# EAGLE board Shifting_microSD_Panel_v10 (EAGLE 7.5.0), part 1 of 5
VERSION: v10
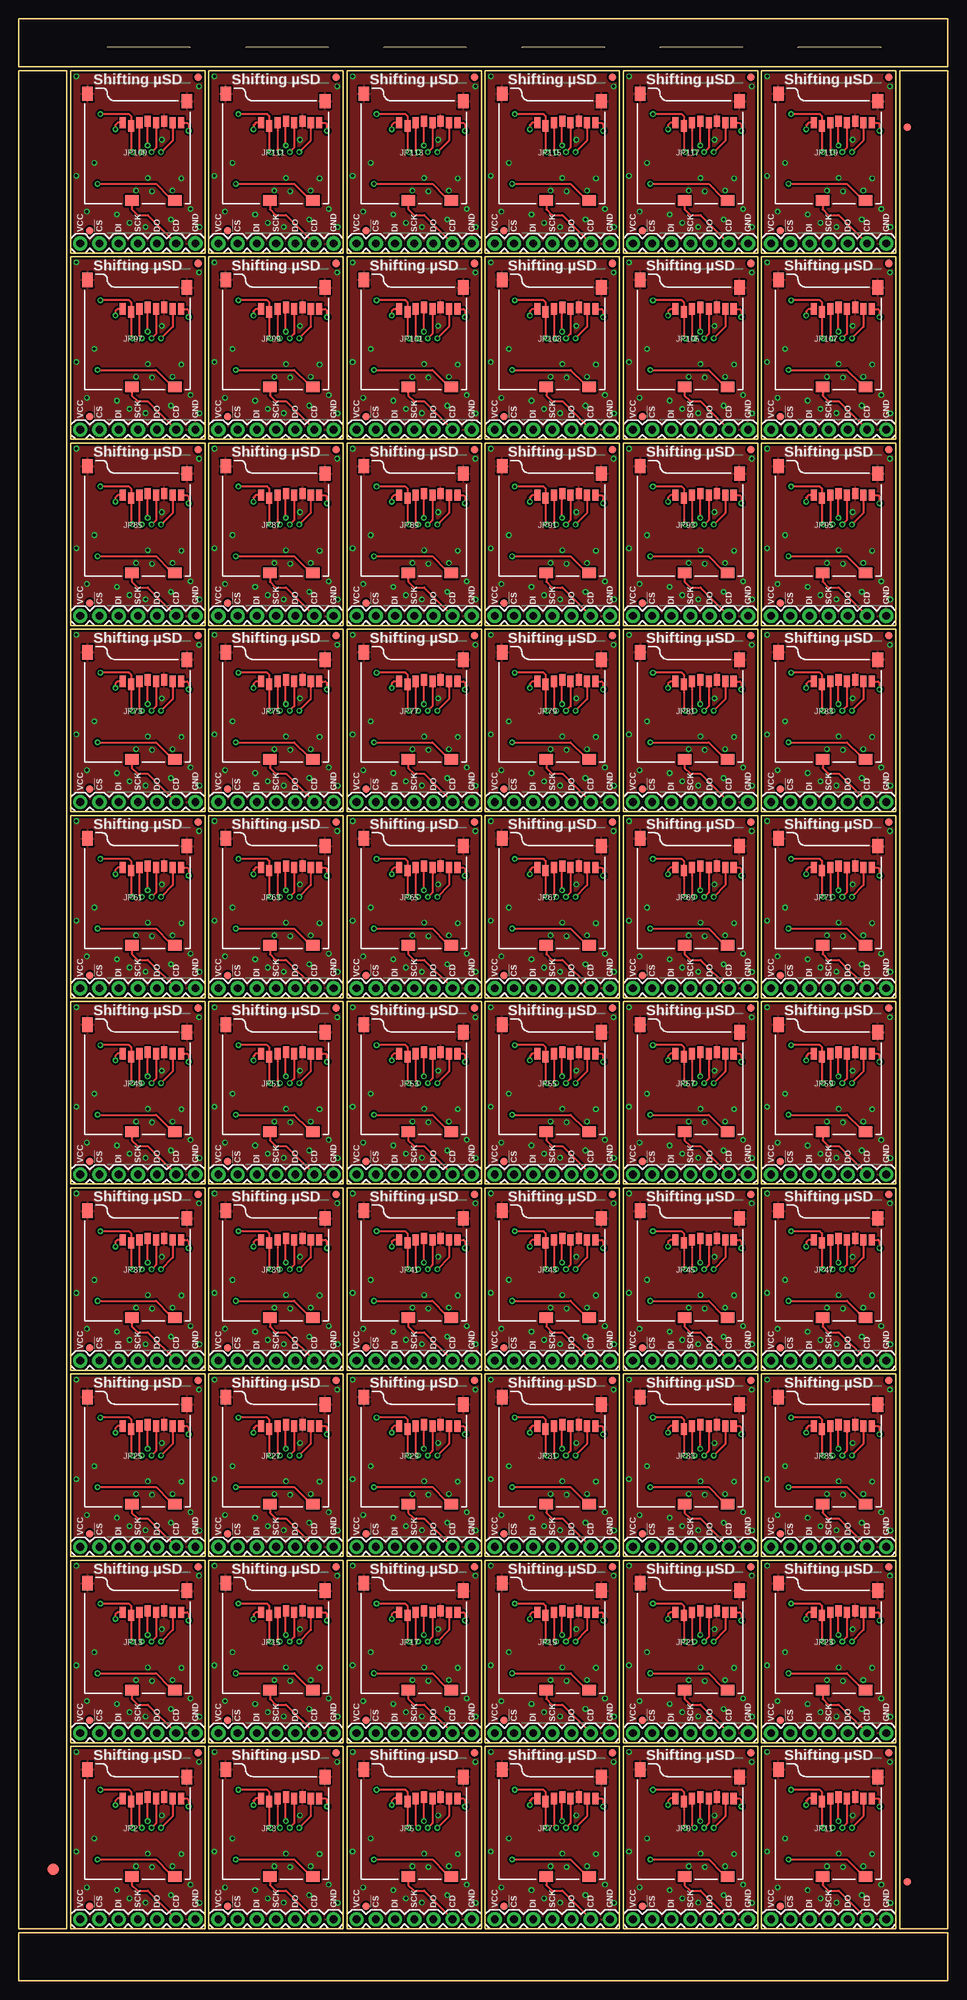
[diagram p0: board, top side]
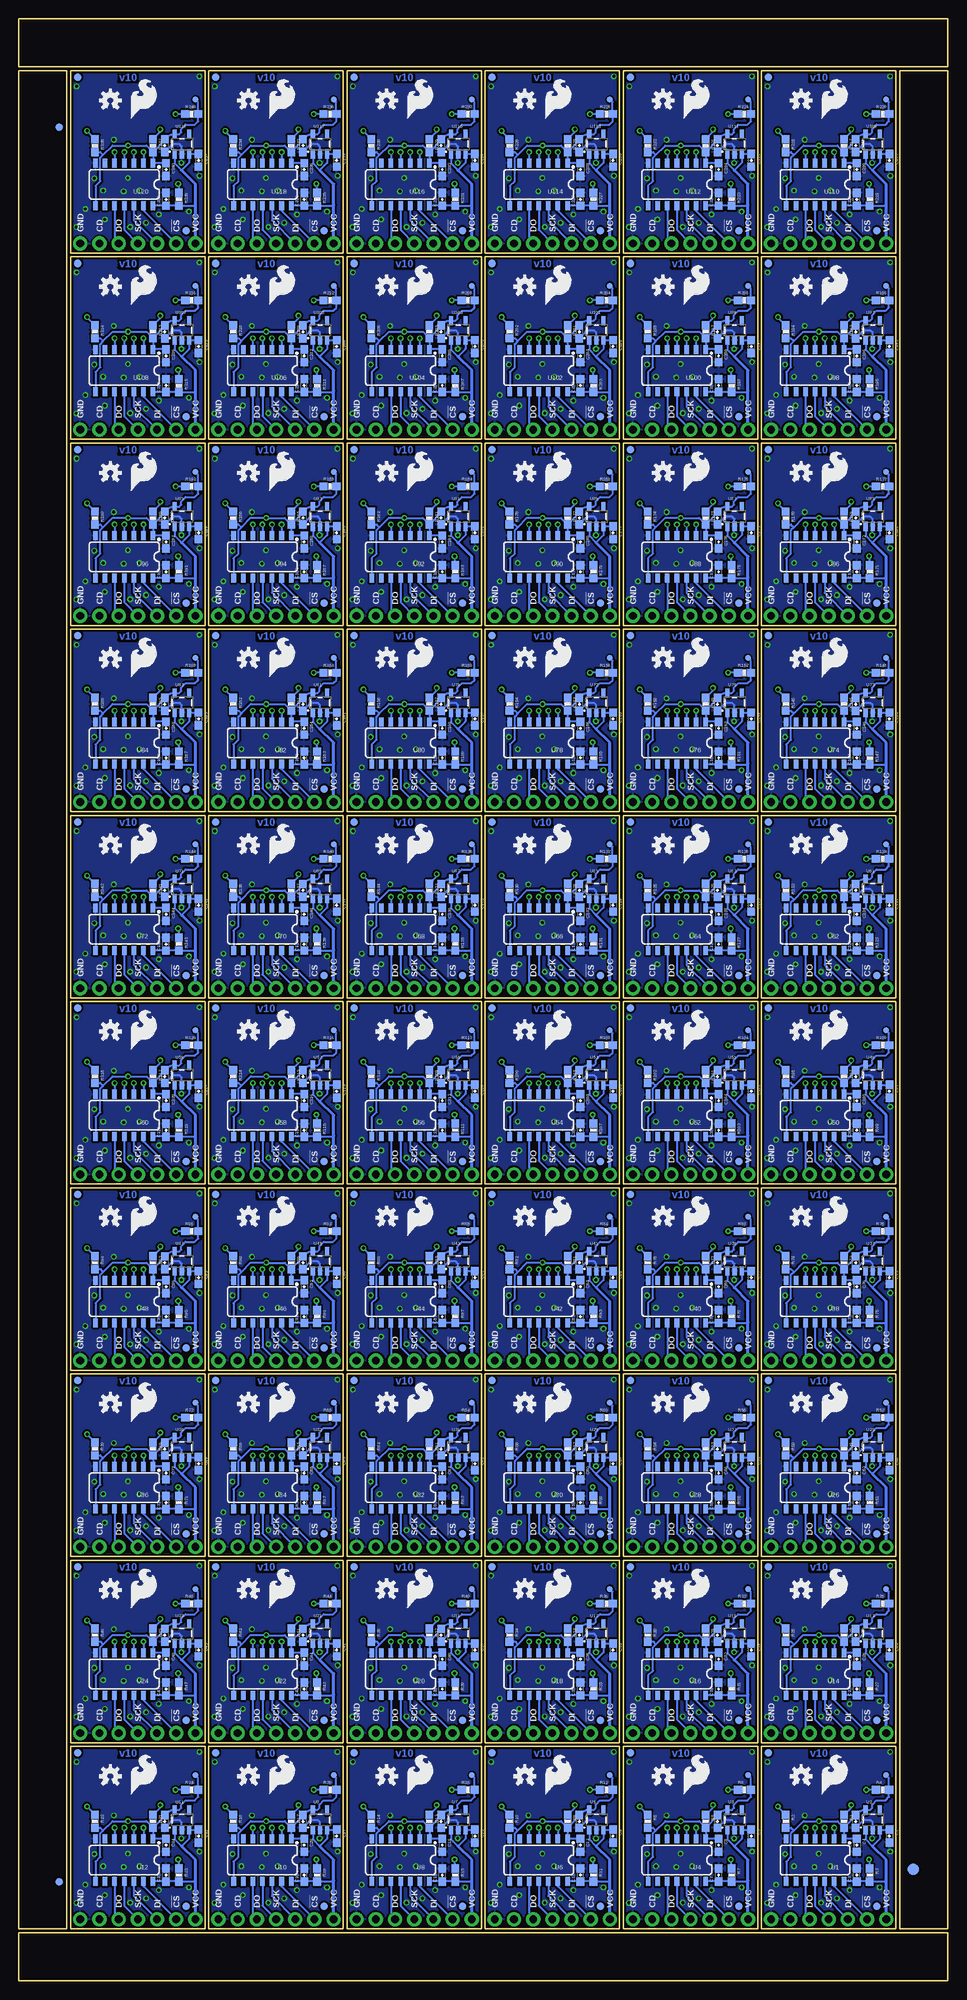
[diagram p1: board, bottom side, seen from below]

Size 122.94 x 259.59 mm. Coordinates in mm from the lower left corner, seen from the top.
Outline: 264 segments
Copper layers (1*16): Top 0.035mm / dielectric 1.5mm / Bottom 0.035mm
Design rules "SparkFun-2-layer-TIGHT": minimum track width 7mil, minimum drill 15mil, track to track 7mil, track to pad 7mil, pad to pad 7mil, via to via 7mil, smd to smd 7mil, copper to edge 7mil, drill to drill 7mil, minimum pad ring 7mil, minimum via ring 7mil, stop-mask expansion 4mil, vias tented up to drill 20mil, thermal gap 10mil

## Footprints (pad centres in the part's own frame; a part is rotated, then mirrored left to right if it is on the bottom)
0603-CAP = smd 1.1 x 1: 1 -0.85,0; 2 0.85,0
FIDUCIAL-1X2 = smd 1 x 1: 1 0,0
FIDUCIAL-1.5X3 = smd 1.5 x 1.5: 1 0,0
1X07 = drill 1.016 pad 1.88: 1 0,0; 2 2.54,0; 3 5.08,0; 4 7.62,0; 5 10.16,0; 6 12.7,0; 7 15.24,0
MICRO-SD-SOCKET-PP = smd 1.8 x 1.4: CD1 -2.05,0.4; CD2 -7.75,0.4 | smd 0.8 x 1.5: CS -7.84,10.3; DI -6.74,10.7; DO -2.34,10.7; GND -3.44,10.9; RSV1 -8.94,10.7; RSV2 -1.24,10.7; SCLK -4.54,10.7; VCC -5.64,10.9 | smd 1.4 x 1.9: GND1 -13.6,14.55; GND3 -0.45,13.55
0603-RES = smd 1.1 x 1: 1 -0.85,0; 2 0.85,0
PAD.03X.03 = smd 0.762 x 0.762: P$1 0,0
SO14 = smd 0.6 x 1.2: 1 -3.81,-2.8; 2 -2.54,-2.8; 3 -1.27,-2.8; 4 0,-2.8; 5 1.27,-2.8; 6 2.54,-2.8; 7 3.81,-2.8; 8 3.81,2.8; 9 2.54,2.8; 10 1.27,2.8; 11 0,2.8; 12 -1.27,2.8; 13 -2.54,2.8; 14 -3.81,2.8
SOT23-5 = smd 0.55 x 1.2: 1 -0.95,-1.3; 2 0,-1.3; 3 0.95,-1.3; 4 0.95,1.3; 5 -0.95,1.3

## Placement (x,y rotation side)
C1  1.0uF  [0603-CAP]  7.71,19.13 270 bottom
C2  1.0uF  [0603-CAP]  12.18,21.07 270 bottom
C3  0.1uF  [0603-CAP]  12.03,13.97 90 bottom
C4  0.1uF  [0603-CAP]  12.03,17.91 270 bottom
C5  1.0uF  [0603-CAP]  26,19.13 270 bottom
C6  1.0uF  [0603-CAP]  30.47,21.07 270 bottom
C7  0.1uF  [0603-CAP]  30.31,13.97 90 bottom
C8  0.1uF  [0603-CAP]  30.31,17.91 270 bottom
C9  1.0uF  [0603-CAP]  44.28,19.13 270 bottom
C10  1.0uF  [0603-CAP]  48.76,21.07 270 bottom
C11  0.1uF  [0603-CAP]  48.6,13.97 90 bottom
C12  0.1uF  [0603-CAP]  48.6,17.91 270 bottom
C13  1.0uF  [0603-CAP]  62.57,19.13 270 bottom
C14  1.0uF  [0603-CAP]  67.04,21.07 270 bottom
C15  0.1uF  [0603-CAP]  66.89,13.97 90 bottom
C16  0.1uF  [0603-CAP]  66.89,17.91 270 bottom
C17  1.0uF  [0603-CAP]  80.86,19.13 270 bottom
C18  1.0uF  [0603-CAP]  85.33,21.07 270 bottom
C19  0.1uF  [0603-CAP]  85.18,13.97 90 bottom
C20  0.1uF  [0603-CAP]  85.18,17.91 270 bottom
C21  1.0uF  [0603-CAP]  99.15,19.13 270 bottom
C22  1.0uF  [0603-CAP]  103.62,21.07 270 bottom
C23  0.1uF  [0603-CAP]  103.47,13.97 90 bottom
C24  0.1uF  [0603-CAP]  103.47,17.91 270 bottom
C25  1.0uF  [0603-CAP]  7.71,43.76 270 bottom
C26  1.0uF  [0603-CAP]  12.18,45.71 270 bottom
C27  0.1uF  [0603-CAP]  12.03,38.61 90 bottom
C28  0.1uF  [0603-CAP]  12.03,42.55 270 bottom
C29  1.0uF  [0603-CAP]  26,43.76 270 bottom
C30  1.0uF  [0603-CAP]  30.47,45.71 270 bottom
C31  0.1uF  [0603-CAP]  30.31,38.61 90 bottom
C32  0.1uF  [0603-CAP]  30.31,42.55 270 bottom
C33  1.0uF  [0603-CAP]  44.28,43.76 270 bottom
C34  1.0uF  [0603-CAP]  48.76,45.71 270 bottom
C35  0.1uF  [0603-CAP]  48.6,38.61 90 bottom
C36  0.1uF  [0603-CAP]  48.6,42.55 270 bottom
C37  1.0uF  [0603-CAP]  62.57,43.76 270 bottom
C38  1.0uF  [0603-CAP]  67.04,45.71 270 bottom
C39  0.1uF  [0603-CAP]  66.89,38.61 90 bottom
C40  0.1uF  [0603-CAP]  66.89,42.55 270 bottom
C41  1.0uF  [0603-CAP]  80.86,43.76 270 bottom
C42  1.0uF  [0603-CAP]  85.33,45.71 270 bottom
C43  0.1uF  [0603-CAP]  85.18,38.61 90 bottom
C44  0.1uF  [0603-CAP]  85.18,42.55 270 bottom
C45  1.0uF  [0603-CAP]  99.15,43.76 270 bottom
C46  1.0uF  [0603-CAP]  103.62,45.71 270 bottom
C47  0.1uF  [0603-CAP]  103.47,38.61 90 bottom
C48  0.1uF  [0603-CAP]  103.47,42.55 270 bottom
C49  1.0uF  [0603-CAP]  7.71,68.4 270 bottom
C50  1.0uF  [0603-CAP]  12.18,70.35 270 bottom
C51  0.1uF  [0603-CAP]  12.03,63.25 90 bottom
C52  0.1uF  [0603-CAP]  12.03,67.18 270 bottom
C53  1.0uF  [0603-CAP]  26,68.4 270 bottom
C54  1.0uF  [0603-CAP]  30.47,70.35 270 bottom
C55  0.1uF  [0603-CAP]  30.31,63.25 90 bottom
C56  0.1uF  [0603-CAP]  30.31,67.18 270 bottom
C57  1.0uF  [0603-CAP]  44.28,68.4 270 bottom
C58  1.0uF  [0603-CAP]  48.76,70.35 270 bottom
C59  0.1uF  [0603-CAP]  48.6,63.25 90 bottom
C60  0.1uF  [0603-CAP]  48.6,67.18 270 bottom
C61  1.0uF  [0603-CAP]  62.57,68.4 270 bottom
C62  1.0uF  [0603-CAP]  67.04,70.35 270 bottom
C63  0.1uF  [0603-CAP]  66.89,63.25 90 bottom
C64  0.1uF  [0603-CAP]  66.89,67.18 270 bottom
C65  1.0uF  [0603-CAP]  80.86,68.4 270 bottom
C66  1.0uF  [0603-CAP]  85.33,70.35 270 bottom
C67  0.1uF  [0603-CAP]  85.18,63.25 90 bottom
C68  0.1uF  [0603-CAP]  85.18,67.18 270 bottom
C69  1.0uF  [0603-CAP]  99.15,68.4 270 bottom
C70  1.0uF  [0603-CAP]  103.62,70.35 270 bottom
C71  0.1uF  [0603-CAP]  103.47,63.25 90 bottom
C72  0.1uF  [0603-CAP]  103.47,67.18 270 bottom
C73  1.0uF  [0603-CAP]  7.71,93.04 270 bottom
C74  1.0uF  [0603-CAP]  12.18,94.98 270 bottom
C75  0.1uF  [0603-CAP]  12.03,87.88 90 bottom
C76  0.1uF  [0603-CAP]  12.03,91.82 270 bottom
C77  1.0uF  [0603-CAP]  26,93.04 270 bottom
C78  1.0uF  [0603-CAP]  30.47,94.98 270 bottom
C79  0.1uF  [0603-CAP]  30.31,87.88 90 bottom
C80  0.1uF  [0603-CAP]  30.31,91.82 270 bottom
C81  1.0uF  [0603-CAP]  44.28,93.04 270 bottom
C82  1.0uF  [0603-CAP]  48.76,94.98 270 bottom
C83  0.1uF  [0603-CAP]  48.6,87.88 90 bottom
C84  0.1uF  [0603-CAP]  48.6,91.82 270 bottom
C85  1.0uF  [0603-CAP]  62.57,93.04 270 bottom
C86  1.0uF  [0603-CAP]  67.04,94.98 270 bottom
C87  0.1uF  [0603-CAP]  66.89,87.88 90 bottom
C88  0.1uF  [0603-CAP]  66.89,91.82 270 bottom
C89  1.0uF  [0603-CAP]  80.86,93.04 270 bottom
C90  1.0uF  [0603-CAP]  85.33,94.98 270 bottom
C91  0.1uF  [0603-CAP]  85.18,87.88 90 bottom
C92  0.1uF  [0603-CAP]  85.18,91.82 270 bottom
C93  1.0uF  [0603-CAP]  99.15,93.04 270 bottom
C94  1.0uF  [0603-CAP]  103.62,94.98 270 bottom
C95  0.1uF  [0603-CAP]  103.47,87.88 90 bottom
C96  0.1uF  [0603-CAP]  103.47,91.82 270 bottom
C97  1.0uF  [0603-CAP]  7.71,117.68 270 bottom
C98  1.0uF  [0603-CAP]  12.18,119.62 270 bottom
C99  0.1uF  [0603-CAP]  12.03,112.52 90 bottom
C100  0.1uF  [0603-CAP]  12.03,116.46 270 bottom
C101  1.0uF  [0603-CAP]  26,117.68 270 bottom
C102  1.0uF  [0603-CAP]  30.47,119.62 270 bottom
C103  0.1uF  [0603-CAP]  30.31,112.52 90 bottom
C104  0.1uF  [0603-CAP]  30.31,116.46 270 bottom
C105  1.0uF  [0603-CAP]  44.28,117.68 270 bottom
C106  1.0uF  [0603-CAP]  48.76,119.62 270 bottom
C107  0.1uF  [0603-CAP]  48.6,112.52 90 bottom
C108  0.1uF  [0603-CAP]  48.6,116.46 270 bottom
C109  1.0uF  [0603-CAP]  62.57,117.68 270 bottom
C110  1.0uF  [0603-CAP]  67.04,119.62 270 bottom
C111  0.1uF  [0603-CAP]  66.89,112.52 90 bottom
C112  0.1uF  [0603-CAP]  66.89,116.46 270 bottom
C113  1.0uF  [0603-CAP]  80.86,117.68 270 bottom
C114  1.0uF  [0603-CAP]  85.33,119.62 270 bottom
C115  0.1uF  [0603-CAP]  85.18,112.52 90 bottom
C116  0.1uF  [0603-CAP]  85.18,116.46 270 bottom
C117  1.0uF  [0603-CAP]  99.15,117.68 270 bottom
C118  1.0uF  [0603-CAP]  103.62,119.62 270 bottom
C119  0.1uF  [0603-CAP]  103.47,112.52 90 bottom
C120  0.1uF  [0603-CAP]  103.47,116.46 270 bottom
C121  1.0uF  [0603-CAP]  7.71,142.32 270 bottom
C122  1.0uF  [0603-CAP]  12.18,144.26 270 bottom
C123  0.1uF  [0603-CAP]  12.03,137.16 90 bottom
C124  0.1uF  [0603-CAP]  12.03,141.1 270 bottom
C125  1.0uF  [0603-CAP]  26,142.32 270 bottom
C126  1.0uF  [0603-CAP]  30.47,144.26 270 bottom
C127  0.1uF  [0603-CAP]  30.31,137.16 90 bottom
C128  0.1uF  [0603-CAP]  30.31,141.1 270 bottom
C129  1.0uF  [0603-CAP]  44.28,142.32 270 bottom
C130  1.0uF  [0603-CAP]  48.76,144.26 270 bottom
C131  0.1uF  [0603-CAP]  48.6,137.16 90 bottom
C132  0.1uF  [0603-CAP]  48.6,141.1 270 bottom
C133  1.0uF  [0603-CAP]  62.57,142.32 270 bottom
C134  1.0uF  [0603-CAP]  67.04,144.26 270 bottom
C135  0.1uF  [0603-CAP]  66.89,137.16 90 bottom
C136  0.1uF  [0603-CAP]  66.89,141.1 270 bottom
C137  1.0uF  [0603-CAP]  80.86,142.32 270 bottom
C138  1.0uF  [0603-CAP]  85.33,144.26 270 bottom
C139  0.1uF  [0603-CAP]  85.18,137.16 90 bottom
C140  0.1uF  [0603-CAP]  85.18,141.1 270 bottom
C141  1.0uF  [0603-CAP]  99.15,142.32 270 bottom
C142  1.0uF  [0603-CAP]  103.62,144.26 270 bottom
C143  0.1uF  [0603-CAP]  103.47,137.16 90 bottom
C144  0.1uF  [0603-CAP]  103.47,141.1 270 bottom
C145  1.0uF  [0603-CAP]  7.71,166.95 270 bottom
C146  1.0uF  [0603-CAP]  12.18,168.9 270 bottom
C147  0.1uF  [0603-CAP]  12.03,161.8 90 bottom
C148  0.1uF  [0603-CAP]  12.03,165.74 270 bottom
C149  1.0uF  [0603-CAP]  26,166.95 270 bottom
C150  1.0uF  [0603-CAP]  30.47,168.9 270 bottom
C151  0.1uF  [0603-CAP]  30.31,161.8 90 bottom
C152  0.1uF  [0603-CAP]  30.31,165.74 270 bottom
C153  1.0uF  [0603-CAP]  44.28,166.95 270 bottom
C154  1.0uF  [0603-CAP]  48.76,168.9 270 bottom
C155  0.1uF  [0603-CAP]  48.6,161.8 90 bottom
C156  0.1uF  [0603-CAP]  48.6,165.74 270 bottom
C157  1.0uF  [0603-CAP]  62.57,166.95 270 bottom
C158  1.0uF  [0603-CAP]  67.04,168.9 270 bottom
C159  0.1uF  [0603-CAP]  66.89,161.8 90 bottom
C160  0.1uF  [0603-CAP]  66.89,165.74 270 bottom
C161  1.0uF  [0603-CAP]  80.86,166.95 270 bottom
C162  1.0uF  [0603-CAP]  85.33,168.9 270 bottom
C163  0.1uF  [0603-CAP]  85.18,161.8 90 bottom
C164  0.1uF  [0603-CAP]  85.18,165.74 270 bottom
C165  1.0uF  [0603-CAP]  99.15,166.95 270 bottom
C166  1.0uF  [0603-CAP]  103.62,168.9 270 bottom
C167  0.1uF  [0603-CAP]  103.47,161.8 90 bottom
C168  0.1uF  [0603-CAP]  103.47,165.74 270 bottom
C169  1.0uF  [0603-CAP]  7.71,191.59 270 bottom
C170  1.0uF  [0603-CAP]  12.18,193.54 270 bottom
C171  0.1uF  [0603-CAP]  12.03,186.44 90 bottom
C172  0.1uF  [0603-CAP]  12.03,190.37 270 bottom
C173  1.0uF  [0603-CAP]  26,191.59 270 bottom
C174  1.0uF  [0603-CAP]  30.47,193.54 270 bottom
C175  0.1uF  [0603-CAP]  30.31,186.44 90 bottom
C176  0.1uF  [0603-CAP]  30.31,190.37 270 bottom
C177  1.0uF  [0603-CAP]  44.28,191.59 270 bottom
C178  1.0uF  [0603-CAP]  48.76,193.54 270 bottom
C179  0.1uF  [0603-CAP]  48.6,186.44 90 bottom
C180  0.1uF  [0603-CAP]  48.6,190.37 270 bottom
C181  1.0uF  [0603-CAP]  62.57,191.59 270 bottom
C182  1.0uF  [0603-CAP]  67.04,193.54 270 bottom
C183  0.1uF  [0603-CAP]  66.89,186.44 90 bottom
C184  0.1uF  [0603-CAP]  66.89,190.37 270 bottom
C185  1.0uF  [0603-CAP]  80.86,191.59 270 bottom
C186  1.0uF  [0603-CAP]  85.33,193.54 270 bottom
C187  0.1uF  [0603-CAP]  85.18,186.44 90 bottom
C188  0.1uF  [0603-CAP]  85.18,190.37 270 bottom
C189  1.0uF  [0603-CAP]  99.15,191.59 270 bottom
C190  1.0uF  [0603-CAP]  103.62,193.54 270 bottom
C191  0.1uF  [0603-CAP]  103.47,186.44 90 bottom
C192  0.1uF  [0603-CAP]  103.47,190.37 270 bottom
C193  1.0uF  [0603-CAP]  7.71,216.23 270 bottom
C194  1.0uF  [0603-CAP]  12.18,218.17 270 bottom
C195  0.1uF  [0603-CAP]  12.03,211.07 90 bottom
C196  0.1uF  [0603-CAP]  12.03,215.01 270 bottom
C197  1.0uF  [0603-CAP]  26,216.23 270 bottom
C198  1.0uF  [0603-CAP]  30.47,218.17 270 bottom
C199  0.1uF  [0603-CAP]  30.31,211.07 90 bottom
C200  0.1uF  [0603-CAP]  30.31,215.01 270 bottom
C201  1.0uF  [0603-CAP]  44.28,216.23 270 bottom
C202  1.0uF  [0603-CAP]  48.76,218.17 270 bottom
C203  0.1uF  [0603-CAP]  48.6,211.07 90 bottom
C204  0.1uF  [0603-CAP]  48.6,215.01 270 bottom
C205  1.0uF  [0603-CAP]  62.57,216.23 270 bottom
C206  1.0uF  [0603-CAP]  67.04,218.17 270 bottom
C207  0.1uF  [0603-CAP]  66.89,211.07 90 bottom
C208  0.1uF  [0603-CAP]  66.89,215.01 270 bottom
C209  1.0uF  [0603-CAP]  80.86,216.23 270 bottom
C210  1.0uF  [0603-CAP]  85.33,218.17 270 bottom
C211  0.1uF  [0603-CAP]  85.18,211.07 90 bottom
C212  0.1uF  [0603-CAP]  85.18,215.01 270 bottom
C213  1.0uF  [0603-CAP]  99.15,216.23 270 bottom
C214  1.0uF  [0603-CAP]  103.62,218.17 270 bottom
C215  0.1uF  [0603-CAP]  103.47,211.07 90 bottom
C216  0.1uF  [0603-CAP]  103.47,215.01 270 bottom
C217  1.0uF  [0603-CAP]  7.71,240.87 270 bottom
C218  1.0uF  [0603-CAP]  12.18,242.81 270 bottom
C219  0.1uF  [0603-CAP]  12.03,235.71 90 bottom
C220  0.1uF  [0603-CAP]  12.03,239.65 270 bottom
C221  1.0uF  [0603-CAP]  26,240.87 270 bottom
C222  1.0uF  [0603-CAP]  30.47,242.81 270 bottom
C223  0.1uF  [0603-CAP]  30.31,235.71 90 bottom
C224  0.1uF  [0603-CAP]  30.31,239.65 270 bottom
C225  1.0uF  [0603-CAP]  44.28,240.87 270 bottom
C226  1.0uF  [0603-CAP]  48.76,242.81 270 bottom
C227  0.1uF  [0603-CAP]  48.6,235.71 90 bottom
C228  0.1uF  [0603-CAP]  48.6,239.65 270 bottom
C229  1.0uF  [0603-CAP]  62.57,240.87 270 bottom
C230  1.0uF  [0603-CAP]  67.04,242.81 270 bottom
C231  0.1uF  [0603-CAP]  66.89,235.71 90 bottom
C232  0.1uF  [0603-CAP]  66.89,239.65 270 bottom
C233  1.0uF  [0603-CAP]  80.86,240.87 270 bottom
C234  1.0uF  [0603-CAP]  85.33,242.81 270 bottom
C235  0.1uF  [0603-CAP]  85.18,235.71 90 bottom
C236  0.1uF  [0603-CAP]  85.18,239.65 270 bottom
C237  1.0uF  [0603-CAP]  99.15,240.87 270 bottom
C238  1.0uF  [0603-CAP]  103.62,242.81 270 bottom
C239  0.1uF  [0603-CAP]  103.47,235.71 90 bottom
C240  0.1uF  [0603-CAP]  103.47,239.65 270 bottom
E$1  [FIDUCIAL-1X2]  117.6,13.08 90 top
E$2  [FIDUCIAL-1.5X3]  4.57,14.73 0 top
E$3  [FIDUCIAL-1.5X3]  4.57,14.73 0 bottom
E$4  [FIDUCIAL-1X2]  117.6,245.24 90 top
E$5  [FIDUCIAL-1X2]  117.6,13.08 90 bottom
E$6  [FIDUCIAL-1X2]  117.6,245.24 90 bottom
FID1  FIDUCIAL1X2  [FIDUCIAL-1X2]  23.72,30.12 0 bottom
FID2  FIDUCIAL1X2  [FIDUCIAL-1X2]  9.37,9.83 0 bottom
FID3  FIDUCIAL1X2  [FIDUCIAL-1X2]  23.72,30.12 0 top
FID4  FIDUCIAL1X2  [FIDUCIAL-1X2]  9.37,9.83 0 top
FID5  FIDUCIAL1X2  [FIDUCIAL-1X2]  42.01,30.12 0 bottom
FID6  FIDUCIAL1X2  [FIDUCIAL-1X2]  27.66,9.83 0 bottom
FID7  FIDUCIAL1X2  [FIDUCIAL-1X2]  42.01,30.12 0 top
FID8  FIDUCIAL1X2  [FIDUCIAL-1X2]  27.66,9.83 0 top
FID9  FIDUCIAL1X2  [FIDUCIAL-1X2]  60.3,30.12 0 bottom
FID10  FIDUCIAL1X2  [FIDUCIAL-1X2]  45.95,9.83 0 bottom
FID11  FIDUCIAL1X2  [FIDUCIAL-1X2]  60.3,30.12 0 top
FID12  FIDUCIAL1X2  [FIDUCIAL-1X2]  45.95,9.83 0 top
FID13  FIDUCIAL1X2  [FIDUCIAL-1X2]  78.59,30.12 0 bottom
FID14  FIDUCIAL1X2  [FIDUCIAL-1X2]  64.24,9.83 0 bottom
FID15  FIDUCIAL1X2  [FIDUCIAL-1X2]  78.59,30.12 0 top
FID16  FIDUCIAL1X2  [FIDUCIAL-1X2]  64.24,9.83 0 top
FID17  FIDUCIAL1X2  [FIDUCIAL-1X2]  96.88,30.12 0 bottom
FID18  FIDUCIAL1X2  [FIDUCIAL-1X2]  82.52,9.83 0 bottom
FID19  FIDUCIAL1X2  [FIDUCIAL-1X2]  96.88,30.12 0 top
FID20  FIDUCIAL1X2  [FIDUCIAL-1X2]  82.52,9.83 0 top
FID21  FIDUCIAL1X2  [FIDUCIAL-1X2]  115.16,30.12 0 bottom
FID22  FIDUCIAL1X2  [FIDUCIAL-1X2]  100.81,9.83 0 bottom
FID23  FIDUCIAL1X2  [FIDUCIAL-1X2]  115.16,30.12 0 top
FID24  FIDUCIAL1X2  [FIDUCIAL-1X2]  100.81,9.83 0 top
FID25  FIDUCIAL1X2  [FIDUCIAL-1X2]  23.72,54.76 0 bottom
FID26  FIDUCIAL1X2  [FIDUCIAL-1X2]  9.37,34.47 0 bottom
FID27  FIDUCIAL1X2  [FIDUCIAL-1X2]  23.72,54.76 0 top
FID28  FIDUCIAL1X2  [FIDUCIAL-1X2]  9.37,34.47 0 top
FID29  FIDUCIAL1X2  [FIDUCIAL-1X2]  42.01,54.76 0 bottom
FID30  FIDUCIAL1X2  [FIDUCIAL-1X2]  27.66,34.47 0 bottom
FID31  FIDUCIAL1X2  [FIDUCIAL-1X2]  42.01,54.76 0 top
FID32  FIDUCIAL1X2  [FIDUCIAL-1X2]  27.66,34.47 0 top
FID33  FIDUCIAL1X2  [FIDUCIAL-1X2]  60.3,54.76 0 bottom
FID34  FIDUCIAL1X2  [FIDUCIAL-1X2]  45.95,34.47 0 bottom
FID35  FIDUCIAL1X2  [FIDUCIAL-1X2]  60.3,54.76 0 top
FID36  FIDUCIAL1X2  [FIDUCIAL-1X2]  45.95,34.47 0 top
FID37  FIDUCIAL1X2  [FIDUCIAL-1X2]  78.59,54.76 0 bottom
FID38  FIDUCIAL1X2  [FIDUCIAL-1X2]  64.24,34.47 0 bottom
FID39  FIDUCIAL1X2  [FIDUCIAL-1X2]  78.59,54.76 0 top
FID40  FIDUCIAL1X2  [FIDUCIAL-1X2]  64.24,34.47 0 top
FID41  FIDUCIAL1X2  [FIDUCIAL-1X2]  96.88,54.76 0 bottom
FID42  FIDUCIAL1X2  [FIDUCIAL-1X2]  82.52,34.47 0 bottom
FID43  FIDUCIAL1X2  [FIDUCIAL-1X2]  96.88,54.76 0 top
FID44  FIDUCIAL1X2  [FIDUCIAL-1X2]  82.52,34.47 0 top
FID45  FIDUCIAL1X2  [FIDUCIAL-1X2]  115.16,54.76 0 bottom
FID46  FIDUCIAL1X2  [FIDUCIAL-1X2]  100.81,34.47 0 bottom
FID47  FIDUCIAL1X2  [FIDUCIAL-1X2]  115.16,54.76 0 top
FID48  FIDUCIAL1X2  [FIDUCIAL-1X2]  100.81,34.47 0 top
FID49  FIDUCIAL1X2  [FIDUCIAL-1X2]  23.72,79.4 0 bottom
FID50  FIDUCIAL1X2  [FIDUCIAL-1X2]  9.37,59.11 0 bottom
FID51  FIDUCIAL1X2  [FIDUCIAL-1X2]  23.72,79.4 0 top
FID52  FIDUCIAL1X2  [FIDUCIAL-1X2]  9.37,59.11 0 top
FID53  FIDUCIAL1X2  [FIDUCIAL-1X2]  42.01,79.4 0 bottom
FID54  FIDUCIAL1X2  [FIDUCIAL-1X2]  27.66,59.11 0 bottom
FID55  FIDUCIAL1X2  [FIDUCIAL-1X2]  42.01,79.4 0 top
FID56  FIDUCIAL1X2  [FIDUCIAL-1X2]  27.66,59.11 0 top
FID57  FIDUCIAL1X2  [FIDUCIAL-1X2]  60.3,79.4 0 bottom
FID58  FIDUCIAL1X2  [FIDUCIAL-1X2]  45.95,59.11 0 bottom
FID59  FIDUCIAL1X2  [FIDUCIAL-1X2]  60.3,79.4 0 top
FID60  FIDUCIAL1X2  [FIDUCIAL-1X2]  45.95,59.11 0 top
FID61  FIDUCIAL1X2  [FIDUCIAL-1X2]  78.59,79.4 0 bottom
FID62  FIDUCIAL1X2  [FIDUCIAL-1X2]  64.24,59.11 0 bottom
FID63  FIDUCIAL1X2  [FIDUCIAL-1X2]  78.59,79.4 0 top
FID64  FIDUCIAL1X2  [FIDUCIAL-1X2]  64.24,59.11 0 top
FID65  FIDUCIAL1X2  [FIDUCIAL-1X2]  96.88,79.4 0 bottom
FID66  FIDUCIAL1X2  [FIDUCIAL-1X2]  82.52,59.11 0 bottom
FID67  FIDUCIAL1X2  [FIDUCIAL-1X2]  96.88,79.4 0 top
FID68  FIDUCIAL1X2  [FIDUCIAL-1X2]  82.52,59.11 0 top
FID69  FIDUCIAL1X2  [FIDUCIAL-1X2]  115.16,79.4 0 bottom
FID70  FIDUCIAL1X2  [FIDUCIAL-1X2]  100.81,59.11 0 bottom
FID71  FIDUCIAL1X2  [FIDUCIAL-1X2]  115.16,79.4 0 top
FID72  FIDUCIAL1X2  [FIDUCIAL-1X2]  100.81,59.11 0 top
FID73  FIDUCIAL1X2  [FIDUCIAL-1X2]  23.72,104.04 0 bottom
FID74  FIDUCIAL1X2  [FIDUCIAL-1X2]  9.37,83.74 0 bottom
FID75  FIDUCIAL1X2  [FIDUCIAL-1X2]  23.72,104.04 0 top
FID76  FIDUCIAL1X2  [FIDUCIAL-1X2]  9.37,83.74 0 top
FID77  FIDUCIAL1X2  [FIDUCIAL-1X2]  42.01,104.04 0 bottom
FID78  FIDUCIAL1X2  [FIDUCIAL-1X2]  27.66,83.74 0 bottom
FID79  FIDUCIAL1X2  [FIDUCIAL-1X2]  42.01,104.04 0 top
FID80  FIDUCIAL1X2  [FIDUCIAL-1X2]  27.66,83.74 0 top
FID81  FIDUCIAL1X2  [FIDUCIAL-1X2]  60.3,104.04 0 bottom
FID82  FIDUCIAL1X2  [FIDUCIAL-1X2]  45.95,83.74 0 bottom
FID83  FIDUCIAL1X2  [FIDUCIAL-1X2]  60.3,104.04 0 top
FID84  FIDUCIAL1X2  [FIDUCIAL-1X2]  45.95,83.74 0 top
FID85  FIDUCIAL1X2  [FIDUCIAL-1X2]  78.59,104.04 0 bottom
FID86  FIDUCIAL1X2  [FIDUCIAL-1X2]  64.24,83.74 0 bottom
FID87  FIDUCIAL1X2  [FIDUCIAL-1X2]  78.59,104.04 0 top
FID88  FIDUCIAL1X2  [FIDUCIAL-1X2]  64.24,83.74 0 top
FID89  FIDUCIAL1X2  [FIDUCIAL-1X2]  96.88,104.04 0 bottom
FID90  FIDUCIAL1X2  [FIDUCIAL-1X2]  82.52,83.74 0 bottom
FID91  FIDUCIAL1X2  [FIDUCIAL-1X2]  96.88,104.04 0 top
FID92  FIDUCIAL1X2  [FIDUCIAL-1X2]  82.52,83.74 0 top
FID93  FIDUCIAL1X2  [FIDUCIAL-1X2]  115.16,104.04 0 bottom
FID94  FIDUCIAL1X2  [FIDUCIAL-1X2]  100.81,83.74 0 bottom
FID95  FIDUCIAL1X2  [FIDUCIAL-1X2]  115.16,104.04 0 top
FID96  FIDUCIAL1X2  [FIDUCIAL-1X2]  100.81,83.74 0 top
FID97  FIDUCIAL1X2  [FIDUCIAL-1X2]  23.72,128.68 0 bottom
FID98  FIDUCIAL1X2  [FIDUCIAL-1X2]  9.37,108.38 0 bottom
FID99  FIDUCIAL1X2  [FIDUCIAL-1X2]  23.72,128.68 0 top
FID100  FIDUCIAL1X2  [FIDUCIAL-1X2]  9.37,108.38 0 top
FID101  FIDUCIAL1X2  [FIDUCIAL-1X2]  42.01,128.68 0 bottom
FID102  FIDUCIAL1X2  [FIDUCIAL-1X2]  27.66,108.38 0 bottom
FID103  FIDUCIAL1X2  [FIDUCIAL-1X2]  42.01,128.68 0 top
FID104  FIDUCIAL1X2  [FIDUCIAL-1X2]  27.66,108.38 0 top
FID105  FIDUCIAL1X2  [FIDUCIAL-1X2]  60.3,128.68 0 bottom
FID106  FIDUCIAL1X2  [FIDUCIAL-1X2]  45.95,108.38 0 bottom
FID107  FIDUCIAL1X2  [FIDUCIAL-1X2]  60.3,128.68 0 top
FID108  FIDUCIAL1X2  [FIDUCIAL-1X2]  45.95,108.38 0 top
FID109  FIDUCIAL1X2  [FIDUCIAL-1X2]  78.59,128.68 0 bottom
FID110  FIDUCIAL1X2  [FIDUCIAL-1X2]  64.24,108.38 0 bottom
FID111  FIDUCIAL1X2  [FIDUCIAL-1X2]  78.59,128.68 0 top
FID112  FIDUCIAL1X2  [FIDUCIAL-1X2]  64.24,108.38 0 top
FID113  FIDUCIAL1X2  [FIDUCIAL-1X2]  96.88,128.68 0 bottom
FID114  FIDUCIAL1X2  [FIDUCIAL-1X2]  82.52,108.38 0 bottom
FID115  FIDUCIAL1X2  [FIDUCIAL-1X2]  96.88,128.68 0 top
FID116  FIDUCIAL1X2  [FIDUCIAL-1X2]  82.52,108.38 0 top
FID117  FIDUCIAL1X2  [FIDUCIAL-1X2]  115.16,128.68 0 bottom
FID118  FIDUCIAL1X2  [FIDUCIAL-1X2]  100.81,108.38 0 bottom
FID119  FIDUCIAL1X2  [FIDUCIAL-1X2]  115.16,128.68 0 top
FID120  FIDUCIAL1X2  [FIDUCIAL-1X2]  100.81,108.38 0 top
FID121  FIDUCIAL1X2  [FIDUCIAL-1X2]  23.72,153.31 0 bottom
FID122  FIDUCIAL1X2  [FIDUCIAL-1X2]  9.37,133.02 0 bottom
FID123  FIDUCIAL1X2  [FIDUCIAL-1X2]  23.72,153.31 0 top
FID124  FIDUCIAL1X2  [FIDUCIAL-1X2]  9.37,133.02 0 top
FID125  FIDUCIAL1X2  [FIDUCIAL-1X2]  42.01,153.31 0 bottom
FID126  FIDUCIAL1X2  [FIDUCIAL-1X2]  27.66,133.02 0 bottom
FID127  FIDUCIAL1X2  [FIDUCIAL-1X2]  42.01,153.31 0 top
FID128  FIDUCIAL1X2  [FIDUCIAL-1X2]  27.66,133.02 0 top
FID129  FIDUCIAL1X2  [FIDUCIAL-1X2]  60.3,153.31 0 bottom
FID130  FIDUCIAL1X2  [FIDUCIAL-1X2]  45.95,133.02 0 bottom
FID131  FIDUCIAL1X2  [FIDUCIAL-1X2]  60.3,153.31 0 top
FID132  FIDUCIAL1X2  [FIDUCIAL-1X2]  45.95,133.02 0 top
FID133  FIDUCIAL1X2  [FIDUCIAL-1X2]  78.59,153.31 0 bottom
FID134  FIDUCIAL1X2  [FIDUCIAL-1X2]  64.24,133.02 0 bottom
FID135  FIDUCIAL1X2  [FIDUCIAL-1X2]  78.59,153.31 0 top
FID136  FIDUCIAL1X2  [FIDUCIAL-1X2]  64.24,133.02 0 top
FID137  FIDUCIAL1X2  [FIDUCIAL-1X2]  96.88,153.31 0 bottom
FID138  FIDUCIAL1X2  [FIDUCIAL-1X2]  82.52,133.02 0 bottom
FID139  FIDUCIAL1X2  [FIDUCIAL-1X2]  96.88,153.31 0 top
FID140  FIDUCIAL1X2  [FIDUCIAL-1X2]  82.52,133.02 0 top
FID141  FIDUCIAL1X2  [FIDUCIAL-1X2]  115.16,153.31 0 bottom
FID142  FIDUCIAL1X2  [FIDUCIAL-1X2]  100.81,133.02 0 bottom
FID143  FIDUCIAL1X2  [FIDUCIAL-1X2]  115.16,153.31 0 top
FID144  FIDUCIAL1X2  [FIDUCIAL-1X2]  100.81,133.02 0 top
FID145  FIDUCIAL1X2  [FIDUCIAL-1X2]  23.72,177.95 0 bottom
FID146  FIDUCIAL1X2  [FIDUCIAL-1X2]  9.37,157.66 0 bottom
FID147  FIDUCIAL1X2  [FIDUCIAL-1X2]  23.72,177.95 0 top
FID148  FIDUCIAL1X2  [FIDUCIAL-1X2]  9.37,157.66 0 top
FID149  FIDUCIAL1X2  [FIDUCIAL-1X2]  42.01,177.95 0 bottom
FID150  FIDUCIAL1X2  [FIDUCIAL-1X2]  27.66,157.66 0 bottom
FID151  FIDUCIAL1X2  [FIDUCIAL-1X2]  42.01,177.95 0 top
FID152  FIDUCIAL1X2  [FIDUCIAL-1X2]  27.66,157.66 0 top
FID153  FIDUCIAL1X2  [FIDUCIAL-1X2]  60.3,177.95 0 bottom
FID154  FIDUCIAL1X2  [FIDUCIAL-1X2]  45.95,157.66 0 bottom
FID155  FIDUCIAL1X2  [FIDUCIAL-1X2]  60.3,177.95 0 top
FID156  FIDUCIAL1X2  [FIDUCIAL-1X2]  45.95,157.66 0 top
FID157  FIDUCIAL1X2  [FIDUCIAL-1X2]  78.59,177.95 0 bottom
FID158  FIDUCIAL1X2  [FIDUCIAL-1X2]  64.24,157.66 0 bottom
FID159  FIDUCIAL1X2  [FIDUCIAL-1X2]  78.59,177.95 0 top
FID160  FIDUCIAL1X2  [FIDUCIAL-1X2]  64.24,157.66 0 top
FID161  FIDUCIAL1X2  [FIDUCIAL-1X2]  96.88,177.95 0 bottom
FID162  FIDUCIAL1X2  [FIDUCIAL-1X2]  82.52,157.66 0 bottom
FID163  FIDUCIAL1X2  [FIDUCIAL-1X2]  96.88,177.95 0 top
FID164  FIDUCIAL1X2  [FIDUCIAL-1X2]  82.52,157.66 0 top
FID165  FIDUCIAL1X2  [FIDUCIAL-1X2]  115.16,177.95 0 bottom
FID166  FIDUCIAL1X2  [FIDUCIAL-1X2]  100.81,157.66 0 bottom
FID167  FIDUCIAL1X2  [FIDUCIAL-1X2]  115.16,177.95 0 top
FID168  FIDUCIAL1X2  [FIDUCIAL-1X2]  100.81,157.66 0 top
FID169  FIDUCIAL1X2  [FIDUCIAL-1X2]  23.72,202.59 0 bottom
FID170  FIDUCIAL1X2  [FIDUCIAL-1X2]  9.37,182.3 0 bottom
FID171  FIDUCIAL1X2  [FIDUCIAL-1X2]  23.72,202.59 0 top
FID172  FIDUCIAL1X2  [FIDUCIAL-1X2]  9.37,182.3 0 top
FID173  FIDUCIAL1X2  [FIDUCIAL-1X2]  42.01,202.59 0 bottom
FID174  FIDUCIAL1X2  [FIDUCIAL-1X2]  27.66,182.3 0 bottom
FID175  FIDUCIAL1X2  [FIDUCIAL-1X2]  42.01,202.59 0 top
FID176  FIDUCIAL1X2  [FIDUCIAL-1X2]  27.66,182.3 0 top
FID177  FIDUCIAL1X2  [FIDUCIAL-1X2]  60.3,202.59 0 bottom
FID178  FIDUCIAL1X2  [FIDUCIAL-1X2]  45.95,182.3 0 bottom
FID179  FIDUCIAL1X2  [FIDUCIAL-1X2]  60.3,202.59 0 top
FID180  FIDUCIAL1X2  [FIDUCIAL-1X2]  45.95,182.3 0 top
FID181  FIDUCIAL1X2  [FIDUCIAL-1X2]  78.59,202.59 0 bottom
FID182  FIDUCIAL1X2  [FIDUCIAL-1X2]  64.24,182.3 0 bottom
FID183  FIDUCIAL1X2  [FIDUCIAL-1X2]  78.59,202.59 0 top
FID184  FIDUCIAL1X2  [FIDUCIAL-1X2]  64.24,182.3 0 top
FID185  FIDUCIAL1X2  [FIDUCIAL-1X2]  96.88,202.59 0 bottom
FID186  FIDUCIAL1X2  [FIDUCIAL-1X2]  82.52,182.3 0 bottom
FID187  FIDUCIAL1X2  [FIDUCIAL-1X2]  96.88,202.59 0 top
FID188  FIDUCIAL1X2  [FIDUCIAL-1X2]  82.52,182.3 0 top
FID189  FIDUCIAL1X2  [FIDUCIAL-1X2]  115.16,202.59 0 bottom
FID190  FIDUCIAL1X2  [FIDUCIAL-1X2]  100.81,182.3 0 bottom
FID191  FIDUCIAL1X2  [FIDUCIAL-1X2]  115.16,202.59 0 top
FID192  FIDUCIAL1X2  [FIDUCIAL-1X2]  100.81,182.3 0 top
FID193  FIDUCIAL1X2  [FIDUCIAL-1X2]  23.72,227.23 0 bottom
FID194  FIDUCIAL1X2  [FIDUCIAL-1X2]  9.37,206.93 0 bottom
FID195  FIDUCIAL1X2  [FIDUCIAL-1X2]  23.72,227.23 0 top
FID196  FIDUCIAL1X2  [FIDUCIAL-1X2]  9.37,206.93 0 top
FID197  FIDUCIAL1X2  [FIDUCIAL-1X2]  42.01,227.23 0 bottom
FID198  FIDUCIAL1X2  [FIDUCIAL-1X2]  27.66,206.93 0 bottom
FID199  FIDUCIAL1X2  [FIDUCIAL-1X2]  42.01,227.23 0 top
FID200  FIDUCIAL1X2  [FIDUCIAL-1X2]  27.66,206.93 0 top
FID201  FIDUCIAL1X2  [FIDUCIAL-1X2]  60.3,227.23 0 bottom
FID202  FIDUCIAL1X2  [FIDUCIAL-1X2]  45.95,206.93 0 bottom
FID203  FIDUCIAL1X2  [FIDUCIAL-1X2]  60.3,227.23 0 top
FID204  FIDUCIAL1X2  [FIDUCIAL-1X2]  45.95,206.93 0 top
FID205  FIDUCIAL1X2  [FIDUCIAL-1X2]  78.59,227.23 0 bottom
FID206  FIDUCIAL1X2  [FIDUCIAL-1X2]  64.24,206.93 0 bottom
FID207  FIDUCIAL1X2  [FIDUCIAL-1X2]  78.59,227.23 0 top
FID208  FIDUCIAL1X2  [FIDUCIAL-1X2]  64.24,206.93 0 top
FID209  FIDUCIAL1X2  [FIDUCIAL-1X2]  96.88,227.23 0 bottom
FID210  FIDUCIAL1X2  [FIDUCIAL-1X2]  82.52,206.93 0 bottom
FID211  FIDUCIAL1X2  [FIDUCIAL-1X2]  96.88,227.23 0 top
FID212  FIDUCIAL1X2  [FIDUCIAL-1X2]  82.52,206.93 0 top
FID213  FIDUCIAL1X2  [FIDUCIAL-1X2]  115.16,227.23 0 bottom
FID214  FIDUCIAL1X2  [FIDUCIAL-1X2]  100.81,206.93 0 bottom
FID215  FIDUCIAL1X2  [FIDUCIAL-1X2]  115.16,227.23 0 top
FID216  FIDUCIAL1X2  [FIDUCIAL-1X2]  100.81,206.93 0 top
FID217  FIDUCIAL1X2  [FIDUCIAL-1X2]  23.72,251.87 0 bottom
FID218  FIDUCIAL1X2  [FIDUCIAL-1X2]  9.37,231.57 0 bottom
FID219  FIDUCIAL1X2  [FIDUCIAL-1X2]  23.72,251.87 0 top
FID220  FIDUCIAL1X2  [FIDUCIAL-1X2]  9.37,231.57 0 top
FID221  FIDUCIAL1X2  [FIDUCIAL-1X2]  42.01,251.87 0 bottom
FID222  FIDUCIAL1X2  [FIDUCIAL-1X2]  27.66,231.57 0 bottom
FID223  FIDUCIAL1X2  [FIDUCIAL-1X2]  42.01,251.87 0 top
FID224  FIDUCIAL1X2  [FIDUCIAL-1X2]  27.66,231.57 0 top
FID225  FIDUCIAL1X2  [FIDUCIAL-1X2]  60.3,251.87 0 bottom
FID226  FIDUCIAL1X2  [FIDUCIAL-1X2]  45.95,231.57 0 bottom
FID227  FIDUCIAL1X2  [FIDUCIAL-1X2]  60.3,251.87 0 top
FID228  FIDUCIAL1X2  [FIDUCIAL-1X2]  45.95,231.57 0 top
FID229  FIDUCIAL1X2  [FIDUCIAL-1X2]  78.59,251.87 0 bottom
FID230  FIDUCIAL1X2  [FIDUCIAL-1X2]  64.24,231.57 0 bottom
FID231  FIDUCIAL1X2  [FIDUCIAL-1X2]  78.59,251.87 0 top
FID232  FIDUCIAL1X2  [FIDUCIAL-1X2]  64.24,231.57 0 top
FID233  FIDUCIAL1X2  [FIDUCIAL-1X2]  96.88,251.87 0 bottom
FID234  FIDUCIAL1X2  [FIDUCIAL-1X2]  82.52,231.57 0 bottom
FID235  FIDUCIAL1X2  [FIDUCIAL-1X2]  96.88,251.87 0 top
FID236  FIDUCIAL1X2  [FIDUCIAL-1X2]  82.52,231.57 0 top
FID237  FIDUCIAL1X2  [FIDUCIAL-1X2]  115.16,251.87 0 bottom
FID238  FIDUCIAL1X2  [FIDUCIAL-1X2]  100.81,231.57 0 bottom
FID239  FIDUCIAL1X2  [FIDUCIAL-1X2]  115.16,251.87 0 top
FID240  FIDUCIAL1X2  [FIDUCIAL-1X2]  100.81,231.57 0 top
JP1  [1X07]  23.37,8.13 180 top
JP2  USD_CONNECTOR  [MICRO-SD-SOCKET-PP]  22.69,13.4 0 top
JP3  USD_CONNECTOR  [MICRO-SD-SOCKET-PP]  40.98,13.4 0 top
JP4  [1X07]  41.66,8.13 180 top
JP5  USD_CONNECTOR  [MICRO-SD-SOCKET-PP]  59.27,13.4 0 top
JP6  [1X07]  59.94,8.13 180 top
JP7  USD_CONNECTOR  [MICRO-SD-SOCKET-PP]  77.56,13.4 0 top
JP8  [1X07]  78.23,8.13 180 top
JP9  USD_CONNECTOR  [MICRO-SD-SOCKET-PP]  95.85,13.4 0 top
JP10  [1X07]  96.52,8.13 180 top
JP11  USD_CONNECTOR  [MICRO-SD-SOCKET-PP]  114.13,13.4 0 top
JP12  [1X07]  114.81,8.13 180 top
JP13  USD_CONNECTOR  [MICRO-SD-SOCKET-PP]  22.69,38.04 0 top
JP14  [1X07]  23.37,32.77 180 top
JP15  USD_CONNECTOR  [MICRO-SD-SOCKET-PP]  40.98,38.04 0 top
JP16  [1X07]  41.66,32.77 180 top
JP17  USD_CONNECTOR  [MICRO-SD-SOCKET-PP]  59.27,38.04 0 top
JP18  [1X07]  59.94,32.77 180 top
JP19  USD_CONNECTOR  [MICRO-SD-SOCKET-PP]  77.56,38.04 0 top
JP20  [1X07]  78.23,32.77 180 top
JP21  USD_CONNECTOR  [MICRO-SD-SOCKET-PP]  95.85,38.04 0 top
JP22  [1X07]  96.52,32.77 180 top
JP23  USD_CONNECTOR  [MICRO-SD-SOCKET-PP]  114.13,38.04 0 top
JP24  [1X07]  114.81,32.77 180 top
JP25  USD_CONNECTOR  [MICRO-SD-SOCKET-PP]  22.69,62.67 0 top
JP26  [1X07]  23.37,57.4 180 top
JP27  USD_CONNECTOR  [MICRO-SD-SOCKET-PP]  40.98,62.67 0 top
JP28  [1X07]  41.66,57.4 180 top
JP29  USD_CONNECTOR  [MICRO-SD-SOCKET-PP]  59.27,62.67 0 top
JP30  [1X07]  59.94,57.4 180 top
JP31  USD_CONNECTOR  [MICRO-SD-SOCKET-PP]  77.56,62.67 0 top
JP32  [1X07]  78.23,57.4 180 top
JP33  USD_CONNECTOR  [MICRO-SD-SOCKET-PP]  95.85,62.67 0 top
JP34  [1X07]  96.52,57.4 180 top
JP35  USD_CONNECTOR  [MICRO-SD-SOCKET-PP]  114.13,62.67 0 top
JP36  [1X07]  114.81,57.4 180 top
JP37  USD_CONNECTOR  [MICRO-SD-SOCKET-PP]  22.69,87.31 0 top
JP38  [1X07]  23.37,82.04 180 top
JP39  USD_CONNECTOR  [MICRO-SD-SOCKET-PP]  40.98,87.31 0 top
JP40  [1X07]  41.66,82.04 180 top
JP41  USD_CONNECTOR  [MICRO-SD-SOCKET-PP]  59.27,87.31 0 top
JP42  [1X07]  59.94,82.04 180 top
JP43  USD_CONNECTOR  [MICRO-SD-SOCKET-PP]  77.56,87.31 0 top
JP44  [1X07]  78.23,82.04 180 top
JP45  USD_CONNECTOR  [MICRO-SD-SOCKET-PP]  95.85,87.31 0 top
JP46  [1X07]  96.52,82.04 180 top
JP47  USD_CONNECTOR  [MICRO-SD-SOCKET-PP]  114.13,87.31 0 top
JP48  [1X07]  114.81,82.04 180 top
JP49  USD_CONNECTOR  [MICRO-SD-SOCKET-PP]  22.69,111.95 0 top
JP50  [1X07]  23.37,106.68 180 top
JP51  USD_CONNECTOR  [MICRO-SD-SOCKET-PP]  40.98,111.95 0 top
JP52  [1X07]  41.66,106.68 180 top
JP53  USD_CONNECTOR  [MICRO-SD-SOCKET-PP]  59.27,111.95 0 top
JP54  [1X07]  59.94,106.68 180 top
JP55  USD_CONNECTOR  [MICRO-SD-SOCKET-PP]  77.56,111.95 0 top
JP56  [1X07]  78.23,106.68 180 top
JP57  USD_CONNECTOR  [MICRO-SD-SOCKET-PP]  95.85,111.95 0 top
JP58  [1X07]  96.52,106.68 180 top
JP59  USD_CONNECTOR  [MICRO-SD-SOCKET-PP]  114.13,111.95 0 top
JP60  [1X07]  114.81,106.68 180 top
JP61  USD_CONNECTOR  [MICRO-SD-SOCKET-PP]  22.69,136.59 0 top
JP62  [1X07]  23.37,131.32 180 top
JP63  USD_CONNECTOR  [MICRO-SD-SOCKET-PP]  40.98,136.59 0 top
JP64  [1X07]  41.66,131.32 180 top
JP65  USD_CONNECTOR  [MICRO-SD-SOCKET-PP]  59.27,136.59 0 top
JP66  [1X07]  59.94,131.32 180 top
JP67  USD_CONNECTOR  [MICRO-SD-SOCKET-PP]  77.56,136.59 0 top
JP68  [1X07]  78.23,131.32 180 top
JP69  USD_CONNECTOR  [MICRO-SD-SOCKET-PP]  95.85,136.59 0 top
JP70  [1X07]  96.52,131.32 180 top
JP71  USD_CONNECTOR  [MICRO-SD-SOCKET-PP]  114.13,136.59 0 top
JP72  [1X07]  114.81,131.32 180 top
JP73  USD_CONNECTOR  [MICRO-SD-SOCKET-PP]  22.69,161.23 0 top
JP74  [1X07]  23.37,155.96 180 top
JP75  USD_CONNECTOR  [MICRO-SD-SOCKET-PP]  40.98,161.23 0 top
JP76  [1X07]  41.66,155.96 180 top
JP77  USD_CONNECTOR  [MICRO-SD-SOCKET-PP]  59.27,161.23 0 top
JP78  [1X07]  59.94,155.96 180 top
JP79  USD_CONNECTOR  [MICRO-SD-SOCKET-PP]  77.56,161.23 0 top
JP80  [1X07]  78.23,155.96 180 top
JP81  USD_CONNECTOR  [MICRO-SD-SOCKET-PP]  95.85,161.23 0 top
JP82  [1X07]  96.52,155.96 180 top
JP83  USD_CONNECTOR  [MICRO-SD-SOCKET-PP]  114.13,161.23 0 top
JP84  [1X07]  114.81,155.96 180 top
JP85  USD_CONNECTOR  [MICRO-SD-SOCKET-PP]  22.69,185.86 0 top
JP86  [1X07]  23.37,180.59 180 top
JP87  USD_CONNECTOR  [MICRO-SD-SOCKET-PP]  40.98,185.86 0 top
JP88  [1X07]  41.66,180.59 180 top
JP89  USD_CONNECTOR  [MICRO-SD-SOCKET-PP]  59.27,185.86 0 top
JP90  [1X07]  59.94,180.59 180 top
JP91  USD_CONNECTOR  [MICRO-SD-SOCKET-PP]  77.56,185.86 0 top
JP92  [1X07]  78.23,180.59 180 top
JP93  USD_CONNECTOR  [MICRO-SD-SOCKET-PP]  95.85,185.86 0 top
JP94  [1X07]  96.52,180.59 180 top
JP95  USD_CONNECTOR  [MICRO-SD-SOCKET-PP]  114.13,185.86 0 top
JP96  [1X07]  114.81,180.59 180 top
JP97  USD_CONNECTOR  [MICRO-SD-SOCKET-PP]  22.69,210.5 0 top
JP98  [1X07]  23.37,205.23 180 top
JP99  USD_CONNECTOR  [MICRO-SD-SOCKET-PP]  40.98,210.5 0 top
JP100  [1X07]  41.66,205.23 180 top
JP101  USD_CONNECTOR  [MICRO-SD-SOCKET-PP]  59.27,210.5 0 top
JP102  [1X07]  59.94,205.23 180 top
JP103  USD_CONNECTOR  [MICRO-SD-SOCKET-PP]  77.56,210.5 0 top
JP104  [1X07]  78.23,205.23 180 top
JP105  USD_CONNECTOR  [MICRO-SD-SOCKET-PP]  95.85,210.5 0 top
JP106  [1X07]  96.52,205.23 180 top
JP107  USD_CONNECTOR  [MICRO-SD-SOCKET-PP]  114.13,210.5 0 top
JP108  [1X07]  114.81,205.23 180 top
JP109  USD_CONNECTOR  [MICRO-SD-SOCKET-PP]  22.69,235.14 0 top
JP110  [1X07]  23.37,229.87 180 top
JP111  USD_CONNECTOR  [MICRO-SD-SOCKET-PP]  40.98,235.14 0 top
JP112  [1X07]  41.66,229.87 180 top
JP113  USD_CONNECTOR  [MICRO-SD-SOCKET-PP]  59.27,235.14 0 top
JP114  [1X07]  59.94,229.87 180 top
JP115  USD_CONNECTOR  [MICRO-SD-SOCKET-PP]  77.56,235.14 0 top
JP116  [1X07]  78.23,229.87 180 top
JP117  USD_CONNECTOR  [MICRO-SD-SOCKET-PP]  95.85,235.14 0 top
JP118  [1X07]  96.52,229.87 180 top
JP119  USD_CONNECTOR  [MICRO-SD-SOCKET-PP]  114.13,235.14 0 top
JP120  [1X07]  114.81,229.87 180 top
LOGO1  SFE_LOGO_FLAME.2_INCH  [SFE_LOGO_FLAME_.2]  16.98,24.45 0 bottom
LOGO2  OSHW-LOGOS  [OSHW-LOGO-S]  19.39,27.05 0 bottom
LOGO3  SFE_LOGO_FLAME.2_INCH  [SFE_LOGO_FLAME_.2]  35.27,24.45 0 bottom
LOGO4  OSHW-LOGOS  [OSHW-LOGO-S]  37.68,27.05 0 bottom
LOGO5  SFE_LOGO_FLAME.2_INCH  [SFE_LOGO_FLAME_.2]  53.56,24.45 0 bottom
LOGO6  OSHW-LOGOS  [OSHW-LOGO-S]  55.97,27.05 0 bottom
LOGO7  SFE_LOGO_FLAME.2_INCH  [SFE_LOGO_FLAME_.2]  71.84,24.45 0 bottom
LOGO8  OSHW-LOGOS  [OSHW-LOGO-S]  74.26,27.05 0 bottom
LOGO9  SFE_LOGO_FLAME.2_INCH  [SFE_LOGO_FLAME_.2]  90.13,24.45 0 bottom
LOGO10  OSHW-LOGOS  [OSHW-LOGO-S]  92.54,27.05 0 bottom
LOGO11  SFE_LOGO_FLAME.2_INCH  [SFE_LOGO_FLAME_.2]  108.42,24.45 0 bottom
LOGO12  OSHW-LOGOS  [OSHW-LOGO-S]  110.83,27.05 0 bottom
LOGO13  SFE_LOGO_FLAME.2_INCH  [SFE_LOGO_FLAME_.2]  16.98,49.09 0 bottom
LOGO14  OSHW-LOGOS  [OSHW-LOGO-S]  19.39,51.69 0 bottom
LOGO15  SFE_LOGO_FLAME.2_INCH  [SFE_LOGO_FLAME_.2]  35.27,49.09 0 bottom
LOGO16  OSHW-LOGOS  [OSHW-LOGO-S]  37.68,51.69 0 bottom
LOGO17  SFE_LOGO_FLAME.2_INCH  [SFE_LOGO_FLAME_.2]  53.56,49.09 0 bottom
LOGO18  OSHW-LOGOS  [OSHW-LOGO-S]  55.97,51.69 0 bottom
LOGO19  SFE_LOGO_FLAME.2_INCH  [SFE_LOGO_FLAME_.2]  71.84,49.09 0 bottom
LOGO20  OSHW-LOGOS  [OSHW-LOGO-S]  74.26,51.69 0 bottom
LOGO21  SFE_LOGO_FLAME.2_INCH  [SFE_LOGO_FLAME_.2]  90.13,49.09 0 bottom
LOGO22  OSHW-LOGOS  [OSHW-LOGO-S]  92.54,51.69 0 bottom
LOGO23  SFE_LOGO_FLAME.2_INCH  [SFE_LOGO_FLAME_.2]  108.42,49.09 0 bottom
LOGO24  OSHW-LOGOS  [OSHW-LOGO-S]  110.83,51.69 0 bottom
LOGO25  SFE_LOGO_FLAME.2_INCH  [SFE_LOGO_FLAME_.2]  16.98,73.72 0 bottom
LOGO26  OSHW-LOGOS  [OSHW-LOGO-S]  19.39,76.33 0 bottom
LOGO27  SFE_LOGO_FLAME.2_INCH  [SFE_LOGO_FLAME_.2]  35.27,73.72 0 bottom
LOGO28  OSHW-LOGOS  [OSHW-LOGO-S]  37.68,76.33 0 bottom
LOGO29  SFE_LOGO_FLAME.2_INCH  [SFE_LOGO_FLAME_.2]  53.56,73.72 0 bottom
LOGO30  OSHW-LOGOS  [OSHW-LOGO-S]  55.97,76.33 0 bottom
LOGO31  SFE_LOGO_FLAME.2_INCH  [SFE_LOGO_FLAME_.2]  71.84,73.72 0 bottom
LOGO32  OSHW-LOGOS  [OSHW-LOGO-S]  74.26,76.33 0 bottom
LOGO33  SFE_LOGO_FLAME.2_INCH  [SFE_LOGO_FLAME_.2]  90.13,73.72 0 bottom
LOGO34  OSHW-LOGOS  [OSHW-LOGO-S]  92.54,76.33 0 bottom
LOGO35  SFE_LOGO_FLAME.2_INCH  [SFE_LOGO_FLAME_.2]  108.42,73.72 0 bottom
LOGO36  OSHW-LOGOS  [OSHW-LOGO-S]  110.83,76.33 0 bottom
LOGO37  SFE_LOGO_FLAME.2_INCH  [SFE_LOGO_FLAME_.2]  16.98,98.36 0 bottom
LOGO38  OSHW-LOGOS  [OSHW-LOGO-S]  19.39,100.97 0 bottom
LOGO39  SFE_LOGO_FLAME.2_INCH  [SFE_LOGO_FLAME_.2]  35.27,98.36 0 bottom
LOGO40  OSHW-LOGOS  [OSHW-LOGO-S]  37.68,100.97 0 bottom
LOGO41  SFE_LOGO_FLAME.2_INCH  [SFE_LOGO_FLAME_.2]  53.56,98.36 0 bottom
LOGO42  OSHW-LOGOS  [OSHW-LOGO-S]  55.97,100.97 0 bottom
LOGO43  SFE_LOGO_FLAME.2_INCH  [SFE_LOGO_FLAME_.2]  71.84,98.36 0 bottom
LOGO44  OSHW-LOGOS  [OSHW-LOGO-S]  74.26,100.97 0 bottom
LOGO45  SFE_LOGO_FLAME.2_INCH  [SFE_LOGO_FLAME_.2]  90.13,98.36 0 bottom
LOGO46  OSHW-LOGOS  [OSHW-LOGO-S]  92.54,100.97 0 bottom
LOGO47  SFE_LOGO_FLAME.2_INCH  [SFE_LOGO_FLAME_.2]  108.42,98.36 0 bottom
LOGO48  OSHW-LOGOS  [OSHW-LOGO-S]  110.83,100.97 0 bottom
LOGO49  SFE_LOGO_FLAME.2_INCH  [SFE_LOGO_FLAME_.2]  16.98,123 0 bottom
LOGO50  OSHW-LOGOS  [OSHW-LOGO-S]  19.39,125.6 0 bottom
LOGO51  SFE_LOGO_FLAME.2_INCH  [SFE_LOGO_FLAME_.2]  35.27,123 0 bottom
LOGO52  OSHW-LOGOS  [OSHW-LOGO-S]  37.68,125.6 0 bottom
LOGO53  SFE_LOGO_FLAME.2_INCH  [SFE_LOGO_FLAME_.2]  53.56,123 0 bottom
LOGO54  OSHW-LOGOS  [OSHW-LOGO-S]  55.97,125.6 0 bottom
LOGO55  SFE_LOGO_FLAME.2_INCH  [SFE_LOGO_FLAME_.2]  71.84,123 0 bottom
LOGO56  OSHW-LOGOS  [OSHW-LOGO-S]  74.26,125.6 0 bottom
LOGO57  SFE_LOGO_FLAME.2_INCH  [SFE_LOGO_FLAME_.2]  90.13,123 0 bottom
LOGO58  OSHW-LOGOS  [OSHW-LOGO-S]  92.54,125.6 0 bottom
LOGO59  SFE_LOGO_FLAME.2_INCH  [SFE_LOGO_FLAME_.2]  108.42,123 0 bottom
LOGO60  OSHW-LOGOS  [OSHW-LOGO-S]  110.83,125.6 0 bottom
LOGO61  SFE_LOGO_FLAME.2_INCH  [SFE_LOGO_FLAME_.2]  16.98,147.64 0 bottom
LOGO62  OSHW-LOGOS  [OSHW-LOGO-S]  19.39,150.24 0 bottom
LOGO63  SFE_LOGO_FLAME.2_INCH  [SFE_LOGO_FLAME_.2]  35.27,147.64 0 bottom
LOGO64  OSHW-LOGOS  [OSHW-LOGO-S]  37.68,150.24 0 bottom
LOGO65  SFE_LOGO_FLAME.2_INCH  [SFE_LOGO_FLAME_.2]  53.56,147.64 0 bottom
LOGO66  OSHW-LOGOS  [OSHW-LOGO-S]  55.97,150.24 0 bottom
LOGO67  SFE_LOGO_FLAME.2_INCH  [SFE_LOGO_FLAME_.2]  71.84,147.64 0 bottom
LOGO68  OSHW-LOGOS  [OSHW-LOGO-S]  74.26,150.24 0 bottom
LOGO69  SFE_LOGO_FLAME.2_INCH  [SFE_LOGO_FLAME_.2]  90.13,147.64 0 bottom
LOGO70  OSHW-LOGOS  [OSHW-LOGO-S]  92.54,150.24 0 bottom
LOGO71  SFE_LOGO_FLAME.2_INCH  [SFE_LOGO_FLAME_.2]  108.42,147.64 0 bottom
LOGO72  OSHW-LOGOS  [OSHW-LOGO-S]  110.83,150.24 0 bottom
LOGO73  SFE_LOGO_FLAME.2_INCH  [SFE_LOGO_FLAME_.2]  16.98,172.28 0 bottom
LOGO74  OSHW-LOGOS  [OSHW-LOGO-S]  19.39,174.88 0 bottom
LOGO75  SFE_LOGO_FLAME.2_INCH  [SFE_LOGO_FLAME_.2]  35.27,172.28 0 bottom
LOGO76  OSHW-LOGOS  [OSHW-LOGO-S]  37.68,174.88 0 bottom
LOGO77  SFE_LOGO_FLAME.2_INCH  [SFE_LOGO_FLAME_.2]  53.56,172.28 0 bottom
LOGO78  OSHW-LOGOS  [OSHW-LOGO-S]  55.97,174.88 0 bottom
LOGO79  SFE_LOGO_FLAME.2_INCH  [SFE_LOGO_FLAME_.2]  71.84,172.28 0 bottom
LOGO80  OSHW-LOGOS  [OSHW-LOGO-S]  74.26,174.88 0 bottom
LOGO81  SFE_LOGO_FLAME.2_INCH  [SFE_LOGO_FLAME_.2]  90.13,172.28 0 bottom
LOGO82  OSHW-LOGOS  [OSHW-LOGO-S]  92.54,174.88 0 bottom
LOGO83  SFE_LOGO_FLAME.2_INCH  [SFE_LOGO_FLAME_.2]  108.42,172.28 0 bottom
LOGO84  OSHW-LOGOS  [OSHW-LOGO-S]  110.83,174.88 0 bottom
LOGO85  SFE_LOGO_FLAME.2_INCH  [SFE_LOGO_FLAME_.2]  16.98,196.91 0 bottom
LOGO86  OSHW-LOGOS  [OSHW-LOGO-S]  19.39,199.52 0 bottom
LOGO87  SFE_LOGO_FLAME.2_INCH  [SFE_LOGO_FLAME_.2]  35.27,196.91 0 bottom
LOGO88  OSHW-LOGOS  [OSHW-LOGO-S]  37.68,199.52 0 bottom
LOGO89  SFE_LOGO_FLAME.2_INCH  [SFE_LOGO_FLAME_.2]  53.56,196.91 0 bottom
LOGO90  OSHW-LOGOS  [OSHW-LOGO-S]  55.97,199.52 0 bottom
LOGO91  SFE_LOGO_FLAME.2_INCH  [SFE_LOGO_FLAME_.2]  71.84,196.91 0 bottom
LOGO92  OSHW-LOGOS  [OSHW-LOGO-S]  74.26,199.52 0 bottom
LOGO93  SFE_LOGO_FLAME.2_INCH  [SFE_LOGO_FLAME_.2]  90.13,196.91 0 bottom
LOGO94  OSHW-LOGOS  [OSHW-LOGO-S]  92.54,199.52 0 bottom
LOGO95  SFE_LOGO_FLAME.2_INCH  [SFE_LOGO_FLAME_.2]  108.42,196.91 0 bottom
LOGO96  OSHW-LOGOS  [OSHW-LOGO-S]  110.83,199.52 0 bottom
LOGO97  SFE_LOGO_FLAME.2_INCH  [SFE_LOGO_FLAME_.2]  16.98,221.55 0 bottom
LOGO98  OSHW-LOGOS  [OSHW-LOGO-S]  19.39,224.16 0 bottom
LOGO99  SFE_LOGO_FLAME.2_INCH  [SFE_LOGO_FLAME_.2]  35.27,221.55 0 bottom
LOGO100  OSHW-LOGOS  [OSHW-LOGO-S]  37.68,224.16 0 bottom
LOGO101  SFE_LOGO_FLAME.2_INCH  [SFE_LOGO_FLAME_.2]  53.56,221.55 0 bottom
LOGO102  OSHW-LOGOS  [OSHW-LOGO-S]  55.97,224.16 0 bottom
LOGO103  SFE_LOGO_FLAME.2_INCH  [SFE_LOGO_FLAME_.2]  71.84,221.55 0 bottom
LOGO104  OSHW-LOGOS  [OSHW-LOGO-S]  74.26,224.16 0 bottom
LOGO105  SFE_LOGO_FLAME.2_INCH  [SFE_LOGO_FLAME_.2]  90.13,221.55 0 bottom
LOGO106  OSHW-LOGOS  [OSHW-LOGO-S]  92.54,224.16 0 bottom
LOGO107  SFE_LOGO_FLAME.2_INCH  [SFE_LOGO_FLAME_.2]  108.42,221.55 0 bottom
LOGO108  OSHW-LOGOS  [OSHW-LOGO-S]  110.83,224.16 0 bottom
LOGO109  SFE_LOGO_FLAME.2_INCH  [SFE_LOGO_FLAME_.2]  16.98,246.19 0 bottom
LOGO110  OSHW-LOGOS  [OSHW-LOGO-S]  19.39,248.79 0 bottom
LOGO111  SFE_LOGO_FLAME.2_INCH  [SFE_LOGO_FLAME_.2]  35.27,246.19 0 bottom
LOGO112  OSHW-LOGOS  [OSHW-LOGO-S]  37.68,248.79 0 bottom
LOGO113  SFE_LOGO_FLAME.2_INCH  [SFE_LOGO_FLAME_.2]  53.56,246.19 0 bottom
LOGO114  OSHW-LOGOS  [OSHW-LOGO-S]  55.97,248.79 0 bottom
LOGO115  SFE_LOGO_FLAME.2_INCH  [SFE_LOGO_FLAME_.2]  71.84,246.19 0 bottom
LOGO116  OSHW-LOGOS  [OSHW-LOGO-S]  74.26,248.79 0 bottom
LOGO117  SFE_LOGO_FLAME.2_INCH  [SFE_LOGO_FLAME_.2]  90.13,246.19 0 bottom
LOGO118  OSHW-LOGOS  [OSHW-LOGO-S]  92.54,248.79 0 bottom
LOGO119  SFE_LOGO_FLAME.2_INCH  [SFE_LOGO_FLAME_.2]  108.42,246.19 0 bottom
LOGO120  OSHW-LOGOS  [OSHW-LOGO-S]  110.83,248.79 0 bottom
R1  100k  [0603-RES]  13.74,21.08 270 bottom
R2  100k  [0603-RES]  21.42,21.08 270 bottom
R3  100k  [0603-RES]  10.31,13.97 270 bottom
R4  100k  [0603-RES]  8.61,25.25 0 bottom
R5  100k  [0603-RES]  32.03,21.08 270 bottom
R6  100k  [0603-RES]  39.71,21.08 270 bottom
R7  100k  [0603-RES]  28.6,13.97 270 bottom
R8  100k  [0603-RES]  26.9,25.25 0 bottom
R9  100k  [0603-RES]  50.32,21.08 270 bottom
R10  100k  [0603-RES]  58,21.08 270 bottom
R11  100k  [0603-RES]  46.89,13.97 270 bottom
R12  100k  [0603-RES]  45.19,25.25 0 bottom
R13  100k  [0603-RES]  68.61,21.08 270 bottom
R14  100k  [0603-RES]  76.29,21.08 270 bottom
R15  100k  [0603-RES]  65.18,13.97 270 bottom
R16  100k  [0603-RES]  63.47,25.25 0 bottom
R17  100k  [0603-RES]  86.89,21.08 270 bottom
R18  100k  [0603-RES]  94.58,21.08 270 bottom
R19  100k  [0603-RES]  83.46,13.97 270 bottom
R20  100k  [0603-RES]  81.76,25.25 0 bottom
R21  100k  [0603-RES]  105.18,21.08 270 bottom
R22  100k  [0603-RES]  112.86,21.08 270 bottom
R23  100k  [0603-RES]  101.75,13.97 270 bottom
R24  100k  [0603-RES]  100.05,25.25 0 bottom
R25  100k  [0603-RES]  13.74,45.72 270 bottom
R26  100k  [0603-RES]  21.42,45.72 270 bottom
R27  100k  [0603-RES]  10.31,38.61 270 bottom
R28  100k  [0603-RES]  8.61,49.89 0 bottom
R29  100k  [0603-RES]  32.03,45.72 270 bottom
R30  100k  [0603-RES]  39.71,45.72 270 bottom
R31  100k  [0603-RES]  28.6,38.61 270 bottom
R32  100k  [0603-RES]  26.9,49.89 0 bottom
R33  100k  [0603-RES]  50.32,45.72 270 bottom
R34  100k  [0603-RES]  58,45.72 270 bottom
R35  100k  [0603-RES]  46.89,38.61 270 bottom
R36  100k  [0603-RES]  45.19,49.89 0 bottom
R37  100k  [0603-RES]  68.61,45.72 270 bottom
R38  100k  [0603-RES]  76.29,45.72 270 bottom
R39  100k  [0603-RES]  65.18,38.61 270 bottom
R40  100k  [0603-RES]  63.47,49.89 0 bottom
R41  100k  [0603-RES]  86.89,45.72 270 bottom
R42  100k  [0603-RES]  94.58,45.72 270 bottom
R43  100k  [0603-RES]  83.46,38.61 270 bottom
R44  100k  [0603-RES]  81.76,49.89 0 bottom
R45  100k  [0603-RES]  105.18,45.72 270 bottom
R46  100k  [0603-RES]  112.86,45.72 270 bottom
R47  100k  [0603-RES]  101.75,38.61 270 bottom
R48  100k  [0603-RES]  100.05,49.89 0 bottom
R49  100k  [0603-RES]  13.74,70.36 270 bottom
R50  100k  [0603-RES]  21.42,70.36 270 bottom
R51  100k  [0603-RES]  10.31,63.25 270 bottom
R52  100k  [0603-RES]  8.61,74.52 0 bottom
R53  100k  [0603-RES]  32.03,70.36 270 bottom
R54  100k  [0603-RES]  39.71,70.36 270 bottom
R55  100k  [0603-RES]  28.6,63.25 270 bottom
R56  100k  [0603-RES]  26.9,74.52 0 bottom
R57  100k  [0603-RES]  50.32,70.36 270 bottom
R58  100k  [0603-RES]  58,70.36 270 bottom
R59  100k  [0603-RES]  46.89,63.25 270 bottom
R60  100k  [0603-RES]  45.19,74.52 0 bottom
R61  100k  [0603-RES]  68.61,70.36 270 bottom
R62  100k  [0603-RES]  76.29,70.36 270 bottom
R63  100k  [0603-RES]  65.18,63.25 270 bottom
R64  100k  [0603-RES]  63.47,74.52 0 bottom
R65  100k  [0603-RES]  86.89,70.36 270 bottom
R66  100k  [0603-RES]  94.58,70.36 270 bottom
R67  100k  [0603-RES]  83.46,63.25 270 bottom
R68  100k  [0603-RES]  81.76,74.52 0 bottom
R69  100k  [0603-RES]  105.18,70.36 270 bottom
R70  100k  [0603-RES]  112.86,70.36 270 bottom
R71  100k  [0603-RES]  101.75,63.25 270 bottom
R72  100k  [0603-RES]  100.05,74.52 0 bottom
R73  100k  [0603-RES]  13.74,95 270 bottom
R74  100k  [0603-RES]  21.42,95 270 bottom
R75  100k  [0603-RES]  10.31,87.88 270 bottom
R76  100k  [0603-RES]  8.61,99.16 0 bottom
R77  100k  [0603-RES]  32.03,95 270 bottom
R78  100k  [0603-RES]  39.71,95 270 bottom
R79  100k  [0603-RES]  28.6,87.88 270 bottom
R80  100k  [0603-RES]  26.9,99.16 0 bottom
R81  100k  [0603-RES]  50.32,95 270 bottom
R82  100k  [0603-RES]  58,95 270 bottom
R83  100k  [0603-RES]  46.89,87.88 270 bottom
R84  100k  [0603-RES]  45.19,99.16 0 bottom
R85  100k  [0603-RES]  68.61,95 270 bottom
R86  100k  [0603-RES]  76.29,95 270 bottom
R87  100k  [0603-RES]  65.18,87.88 270 bottom
R88  100k  [0603-RES]  63.47,99.16 0 bottom
R89  100k  [0603-RES]  86.89,95 270 bottom
R90  100k  [0603-RES]  94.58,95 270 bottom
R91  100k  [0603-RES]  83.46,87.88 270 bottom
R92  100k  [0603-RES]  81.76,99.16 0 bottom
R93  100k  [0603-RES]  105.18,95 270 bottom
R94  100k  [0603-RES]  112.86,95 270 bottom
R95  100k  [0603-RES]  101.75,87.88 270 bottom
R96  100k  [0603-RES]  100.05,99.16 0 bottom
R97  100k  [0603-RES]  13.74,119.63 270 bottom
R98  100k  [0603-RES]  21.42,119.63 270 bottom
R99  100k  [0603-RES]  10.31,112.52 270 bottom
R100  100k  [0603-RES]  8.61,123.8 0 bottom
R101  100k  [0603-RES]  32.03,119.63 270 bottom
R102  100k  [0603-RES]  39.71,119.63 270 bottom
R103  100k  [0603-RES]  28.6,112.52 270 bottom
R104  100k  [0603-RES]  26.9,123.8 0 bottom
R105  100k  [0603-RES]  50.32,119.63 270 bottom
R106  100k  [0603-RES]  58,119.63 270 bottom
R107  100k  [0603-RES]  46.89,112.52 270 bottom
R108  100k  [0603-RES]  45.19,123.8 0 bottom
R109  100k  [0603-RES]  68.61,119.63 270 bottom
R110  100k  [0603-RES]  76.29,119.63 270 bottom
R111  100k  [0603-RES]  65.18,112.52 270 bottom
R112  100k  [0603-RES]  63.47,123.8 0 bottom
R113  100k  [0603-RES]  86.89,119.63 270 bottom
R114  100k  [0603-RES]  94.58,119.63 270 bottom
R115  100k  [0603-RES]  83.46,112.52 270 bottom
R116  100k  [0603-RES]  81.76,123.8 0 bottom
R117  100k  [0603-RES]  105.18,119.63 270 bottom
R118  100k  [0603-RES]  112.86,119.63 270 bottom
R119  100k  [0603-RES]  101.75,112.52 270 bottom
R120  100k  [0603-RES]  100.05,123.8 0 bottom
R121  100k  [0603-RES]  13.74,144.27 270 bottom
R122  100k  [0603-RES]  21.42,144.27 270 bottom
R123  100k  [0603-RES]  10.31,137.16 270 bottom
R124  100k  [0603-RES]  8.61,148.44 0 bottom
R125  100k  [0603-RES]  32.03,144.27 270 bottom
R126  100k  [0603-RES]  39.71,144.27 270 bottom
R127  100k  [0603-RES]  28.6,137.16 270 bottom
R128  100k  [0603-RES]  26.9,148.44 0 bottom
R129  100k  [0603-RES]  50.32,144.27 270 bottom
R130  100k  [0603-RES]  58,144.27 270 bottom
R131  100k  [0603-RES]  46.89,137.16 270 bottom
R132  100k  [0603-RES]  45.19,148.44 0 bottom
R133  100k  [0603-RES]  68.61,144.27 270 bottom
R134  100k  [0603-RES]  76.29,144.27 270 bottom
R135  100k  [0603-RES]  65.18,137.16 270 bottom
R136  100k  [0603-RES]  63.47,148.44 0 bottom
R137  100k  [0603-RES]  86.89,144.27 270 bottom
R138  100k  [0603-RES]  94.58,144.27 270 bottom
R139  100k  [0603-RES]  83.46,137.16 270 bottom
R140  100k  [0603-RES]  81.76,148.44 0 bottom
R141  100k  [0603-RES]  105.18,144.27 270 bottom
R142  100k  [0603-RES]  112.86,144.27 270 bottom
R143  100k  [0603-RES]  101.75,137.16 270 bottom
R144  100k  [0603-RES]  100.05,148.44 0 bottom
R145  100k  [0603-RES]  13.74,168.91 270 bottom
R146  100k  [0603-RES]  21.42,168.91 270 bottom
R147  100k  [0603-RES]  10.31,161.8 270 bottom
R148  100k  [0603-RES]  8.61,173.08 0 bottom
R149  100k  [0603-RES]  32.03,168.91 270 bottom
R150  100k  [0603-RES]  39.71,168.91 270 bottom
R151  100k  [0603-RES]  28.6,161.8 270 bottom
R152  100k  [0603-RES]  26.9,173.08 0 bottom
R153  100k  [0603-RES]  50.32,168.91 270 bottom
R154  100k  [0603-RES]  58,168.91 270 bottom
R155  100k  [0603-RES]  46.89,161.8 270 bottom
R156  100k  [0603-RES]  45.19,173.08 0 bottom
R157  100k  [0603-RES]  68.61,168.91 270 bottom
R158  100k  [0603-RES]  76.29,168.91 270 bottom
R159  100k  [0603-RES]  65.18,161.8 270 bottom
R160  100k  [0603-RES]  63.47,173.08 0 bottom
R161  100k  [0603-RES]  86.89,168.91 270 bottom
R162  100k  [0603-RES]  94.58,168.91 270 bottom
R163  100k  [0603-RES]  83.46,161.8 270 bottom
R164  100k  [0603-RES]  81.76,173.08 0 bottom
R165  100k  [0603-RES]  105.18,168.91 270 bottom
R166  100k  [0603-RES]  112.86,168.91 270 bottom
R167  100k  [0603-RES]  101.75,161.8 270 bottom
R168  100k  [0603-RES]  100.05,173.08 0 bottom
R169  100k  [0603-RES]  13.74,193.55 270 bottom
R170  100k  [0603-RES]  21.42,193.55 270 bottom
R171  100k  [0603-RES]  10.31,186.44 270 bottom
R172  100k  [0603-RES]  8.61,197.71 0 bottom
R173  100k  [0603-RES]  32.03,193.55 270 bottom
R174  100k  [0603-RES]  39.71,193.55 270 bottom
R175  100k  [0603-RES]  28.6,186.44 270 bottom
R176  100k  [0603-RES]  26.9,197.71 0 bottom
R177  100k  [0603-RES]  50.32,193.55 270 bottom
R178  100k  [0603-RES]  58,193.55 270 bottom
R179  100k  [0603-RES]  46.89,186.44 270 bottom
R180  100k  [0603-RES]  45.19,197.71 0 bottom
R181  100k  [0603-RES]  68.61,193.55 270 bottom
R182  100k  [0603-RES]  76.29,193.55 270 bottom
R183  100k  [0603-RES]  65.18,186.44 270 bottom
R184  100k  [0603-RES]  63.47,197.71 0 bottom
R185  100k  [0603-RES]  86.89,193.55 270 bottom
R186  100k  [0603-RES]  94.58,193.55 270 bottom
R187  100k  [0603-RES]  83.46,186.44 270 bottom
R188  100k  [0603-RES]  81.76,197.71 0 bottom
R189  100k  [0603-RES]  105.18,193.55 270 bottom
R190  100k  [0603-RES]  112.86,193.55 270 bottom
R191  100k  [0603-RES]  101.75,186.44 270 bottom
R192  100k  [0603-RES]  100.05,197.71 0 bottom
R193  100k  [0603-RES]  13.74,218.19 270 bottom
R194  100k  [0603-RES]  21.42,218.19 270 bottom
R195  100k  [0603-RES]  10.31,211.07 270 bottom
R196  100k  [0603-RES]  8.61,222.35 0 bottom
R197  100k  [0603-RES]  32.03,218.19 270 bottom
R198  100k  [0603-RES]  39.71,218.19 270 bottom
R199  100k  [0603-RES]  28.6,211.07 270 bottom